# EAGLE board pinheader_v7 (EAGLE 9.2.2)
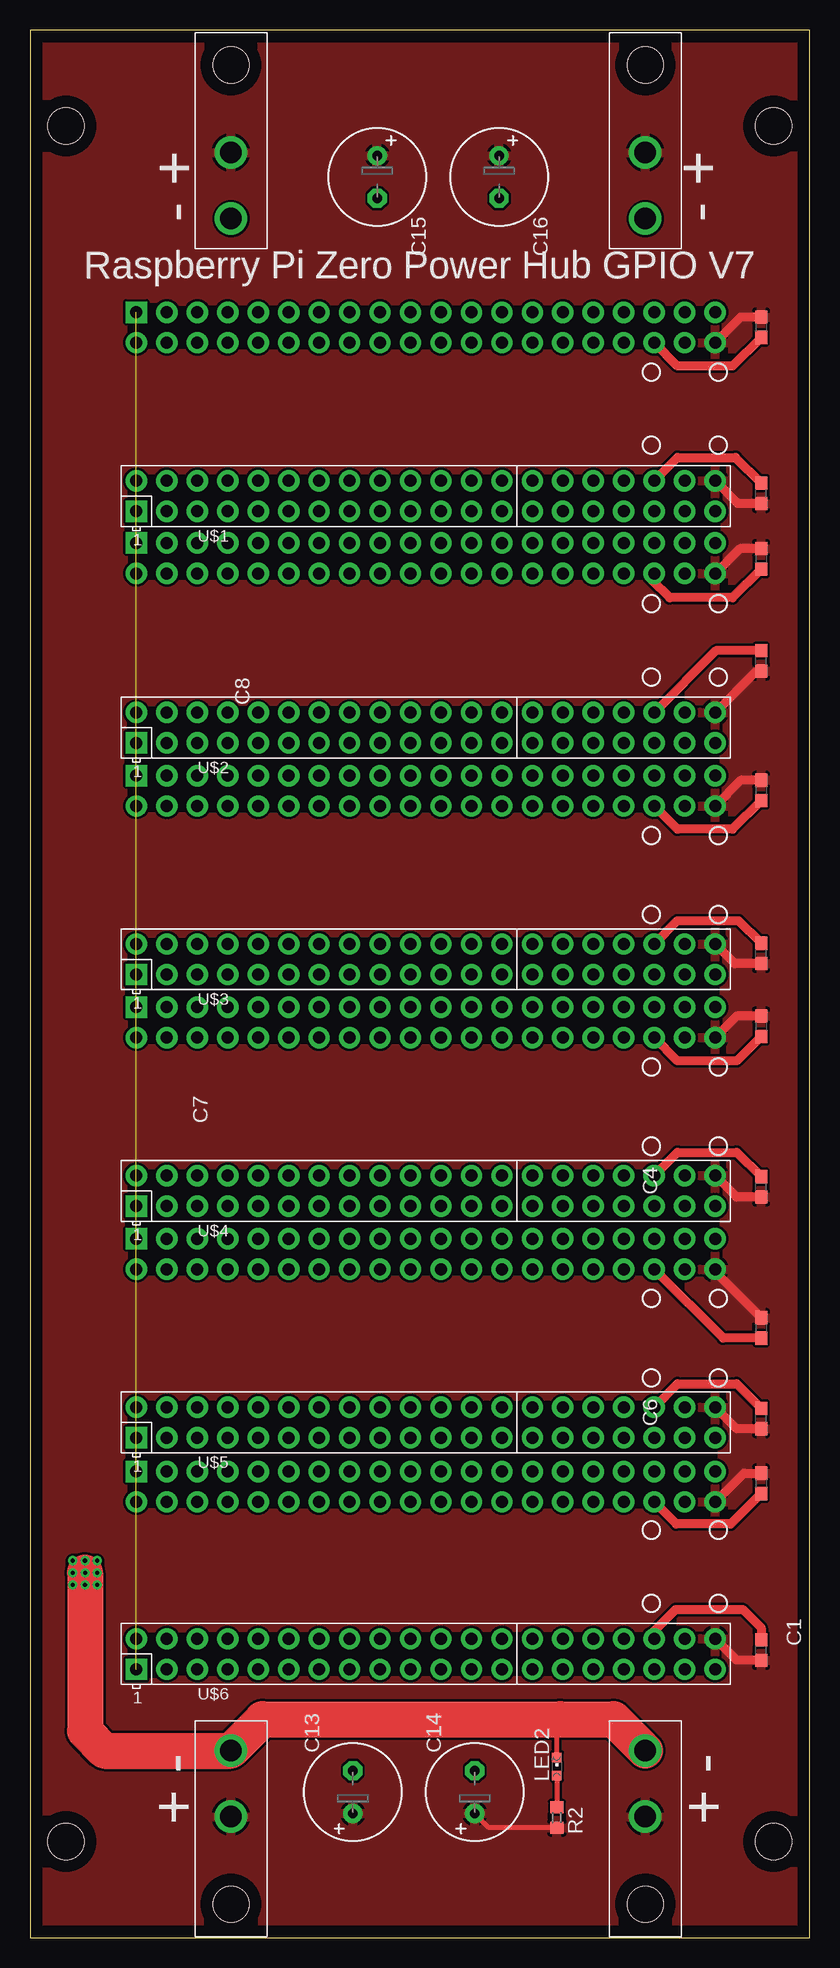
[diagram p0: board, top side]
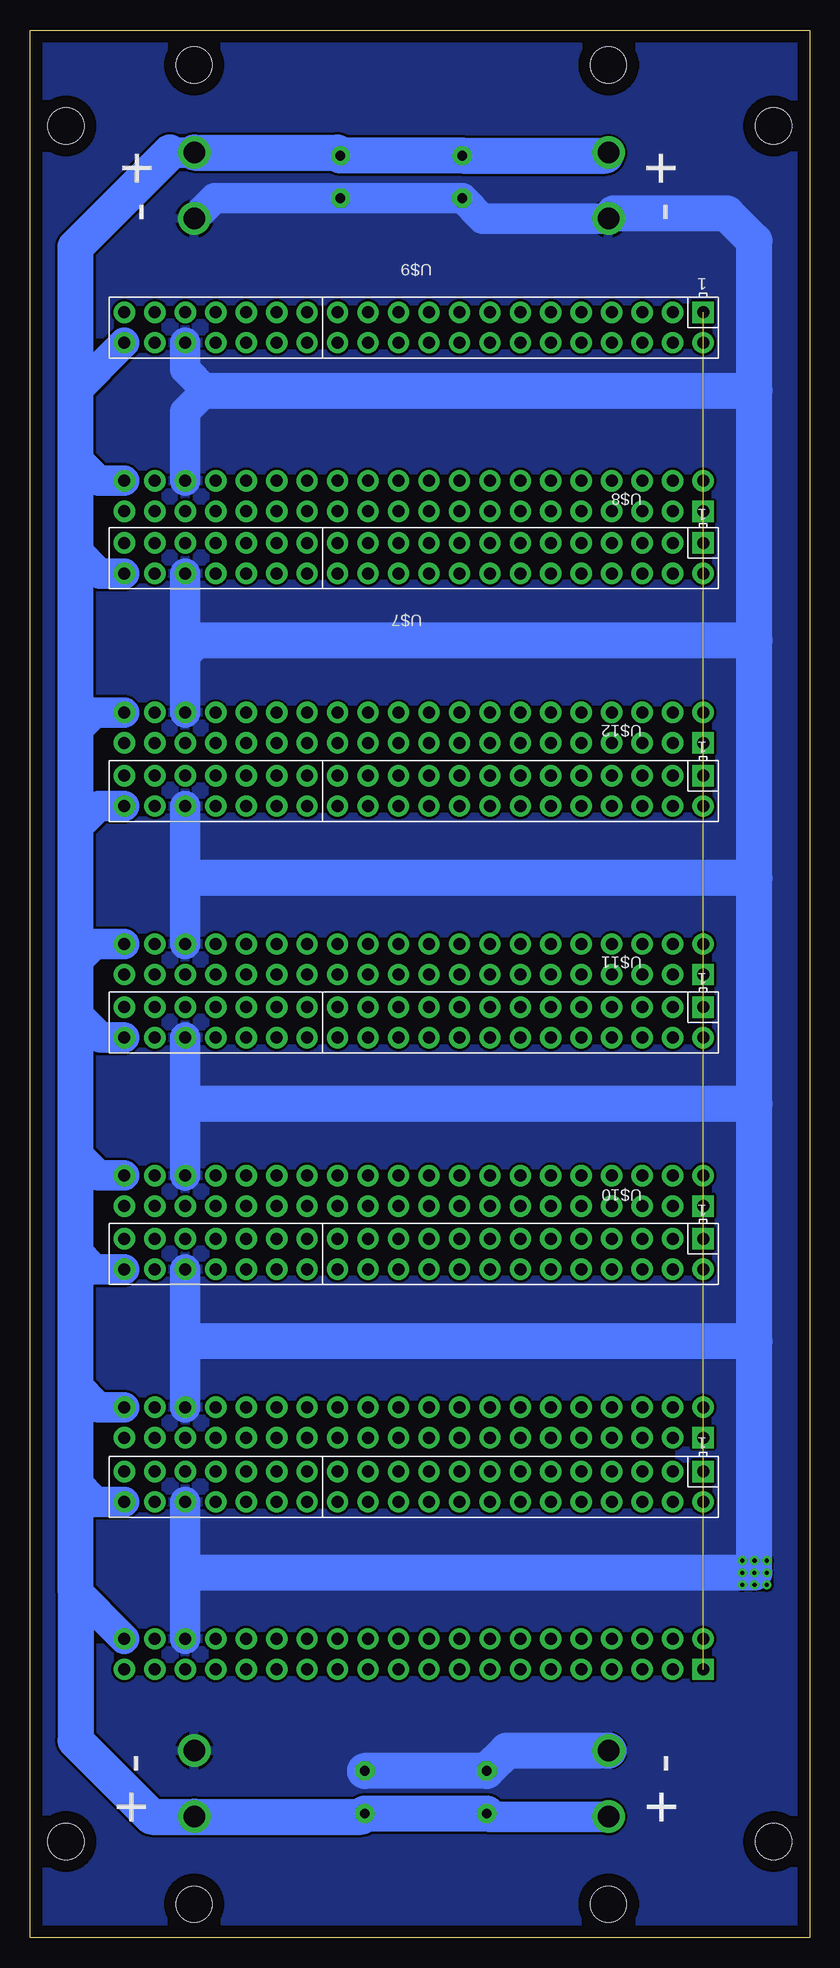
[diagram p1: board, bottom side, seen from below]

Size 65 x 159 mm. Coordinates in mm from the lower left corner, seen from the top.
Outline: 0,0 65,0 65,159 0,159 0,0
Copper layers (1*16): Top 0.035mm / dielectric 1.5mm / Bottom 0.035mm
Design rules "default *": minimum track width 6mil, minimum drill 0.35mm, track to track 8mil, track to pad 8mil, pad to pad 8mil, via to via 8mil, smd to smd 8mil, copper to edge 40mil, drill to drill 6mil, minimum pad ring 0mil, minimum via ring 8mil, stop-mask expansion 4mil, vias tented up to drill 0mil, thermal gap 10mil
Holes 3 mm at 3,8 62,8 3,151 62,151

## Footprints (pad centres in the part's own frame; a part is rotated, then mirrored left to right if it is on the bottom)
C0603 = smd 1.1 x 1: 1 -0.85,0; 2 0.85,0
E3,5-8 = drill 0.813 pad 1.6: + -1.778,0 | drill 0.813 pad 1.6 octagon: - 1.778,0
CHIPLED_0603 = smd 0.8 x 0.8: A 0,-0.75; C 0,0.75
R0603 = smd 1 x 1.1: 1 -0.85,0; 2 0.85,0
RASPI_GPIO_B+_PIN = drill 1 pad 1.778 square: 1 -24.13,-1.27 | drill 1 pad 1.778: 2 -24.13,1.27; 3 -21.59,-1.27; 4 -21.59,1.27; 5 -19.05,-1.27; 6 -19.05,1.27; 7 -16.51,-1.27; 8 -16.51,1.27; 9 -13.97,-1.27; 10 -13.97,1.27; 11 -11.43,-1.27; 12 -11.43,1.27; 13 -8.89,-1.27; 14 -8.89,1.27; 15 -6.35,-1.27; 16 -6.35,1.27; 17 -3.81,-1.27; 18 -3.81,1.27; 19 -1.27,-1.27; 20 -1.27,1.27; 21 1.27,-1.27; 22 1.27,1.27; 23 3.81,-1.27; 24 3.81,1.27; 25 6.35,-1.27; 26 6.35,1.27; 27 8.89,-1.27; 28 8.89,1.27; 29 11.43,-1.27; 30 11.43,1.27; 31 13.97,-1.27; 32 13.97,1.27; 33 16.51,-1.27; 34 16.51,1.27; 35 19.05,-1.27; 36 19.05,1.27; 37 21.59,-1.27; 38 21.59,1.27; 39 24.13,-1.27; 40 24.13,1.27
MINI-FIT_JR_CONN = drill 1.8: P$1 0,0; P$2 0,5.5 | hole 3: 0,-7.3

## Placement (x,y rotation side)
C1  [C0603]  60.96,23.96 90 top
C2  [C0603]  60.96,37.86 270 top
C3  [C0603]  60.96,75.96 270 top
C4  [C0603]  60.96,62.57 90 top
C5  [C0603]  60.96,50.81 270 top
C6  [C0603]  60.96,43.26 90 top
C7  [C0603]  60.96,82.03 90 top
C8  [C0603]  60.96,120.38 90 top
C9  [C0603]  60.96,134.22 270 top
C10  [C0603]  60.96,95.61 270 top
C11  [C0603]  60.96,106.41 90 top
C12  [C0603]  60.96,114.92 270 top
C13  [E3,5-8]  26.92,12.11 90 top
C14  [E3,5-8]  37.08,12.11 90 top
C15  [E3,5-8]  28.96,146.75 270 top
C16  [E3,5-8]  39.12,146.75 270 top
LED2  [CHIPLED_0603]  43.93,14.26 0 top
R2  [R0603]  43.93,10 270 top
U$1  RASPI_GPIO_B+_PWR  [RASPI_GPIO_B+_PIN]  33,120.15 0 top
U$2  RASPI_GPIO_B+_PWR  [RASPI_GPIO_B+_PIN]  33,100.84 0 top
U$3  RASPI_GPIO_B+_PWR  [RASPI_GPIO_B+_PIN]  33,81.54 0 top
U$4  RASPI_GPIO_B+_PWR  [RASPI_GPIO_B+_PIN]  33,62.24 0 top
U$5  RASPI_GPIO_B+_PWR  [RASPI_GPIO_B+_PIN]  33,42.93 0 top
U$6  RASPI_GPIO_B+_PWR  [RASPI_GPIO_B+_PIN]  33,23.63 0 top
U$7  RASPI_GPIO_B+_PWR  [RASPI_GPIO_B+_PIN]  33,114.98 180 bottom
U$8  RASPI_GPIO_B+_PWR  [RASPI_GPIO_B+_PIN]  33,95.58 180 bottom
U$9  RASPI_GPIO_B+_PWR  [RASPI_GPIO_B+_PIN]  33,134.2 180 bottom
U$10  RASPI_GPIO_B+_PWR  [RASPI_GPIO_B+_PIN]  33,37.58 180 bottom
U$11  RASPI_GPIO_B+_PWR  [RASPI_GPIO_B+_PIN]  33,56.98 180 bottom
U$12  RASPI_GPIO_B+_PWR  [RASPI_GPIO_B+_PIN]  33,76.28 180 bottom
U$13  MOLEX_0039301022  [MINI-FIT_JR_CONN]  51.31,10.08 0 top
U$14  MOLEX_0039301022  [MINI-FIT_JR_CONN]  16.76,10.08 0 top
U$15  MOLEX_0039301022  [MINI-FIT_JR_CONN]  16.76,148.78 180 top
U$16  MOLEX_0039301022  [MINI-FIT_JR_CONN]  51.31,148.78 180 top

## Library data of the parts
C1-C12 = rcl; SPICEPREFIX: C
C13-C16 LED2 R2 = adafruit
U$1-U$12 = raspberrypi_bastelstube_v13
U$13-U$16 = pat

## Nets
3V3: U$1.1 U$2.1 U$3.1 U$4.1 U$5.1 U$6.1 U$7.1 U$8.1 U$9.1 U$10.1 U$11.1 U$12.1
GND: C1.2 C2.2 C3.2 C4.2 C5.2 C6.2 C7.2 C8.2 C9.2 C10.2 C11.2 C12.2 C13.- C14.- C15.- C16.- LED2.C U$1.36 U$2.36 U$3.36 U$4.36 U$5.36 U$6.36 U$7.36 U$8.36 U$9.36 U$10.36 U$11.36 U$12.36 U$13.P$2 U$14.P$2 U$15.P$2 U$16.P$2
N$4: LED2.A R2.1
V+: C1.1 C2.1 C3.1 C4.1 C5.1 C6.1 C7.1 C8.1 C9.1 C10.1 C11.1 C12.1 C13.+ C14.+ C15.+ C16.+ R2.2 U$1.40 U$2.40 U$3.40 U$4.40 U$5.40 U$6.40 U$7.40 U$8.40 U$9.40 U$10.40 U$11.40 U$12.40 U$13.P$1 U$14.P$1 U$15.P$1 U$16.P$1

## Tracks (layer width: path | path; a pad name or v marks a point on that pad's centre or on a via)
3V3  (11 unrouted)
GND  (via drill 0.35)
  Top 0.406: LED2.C 43.93,17.94 44.2,18.21
  Top 0.762: U$6.36 52.05,25.55 53.85,27.35 59.44,27.35 60.96,25.83 C1.2 | C2.2 58.42,34.46 53.89,34.46 U$10.36 | U$5.36 53.99,46.15 58.93,46.15 C6.2 | U$4.36 53.99,65.45 58.93,65.45 C4.2 | C3.2 58.93,73.07 53.98,73.07 U$12.36 | U$3.36 53.99,84.76 59.08,84.76 C7.2 | C10.2 58.57,92.38 53.98,92.38 U$8.36 | C12.2 58.57,111.68 53.34,111.68 51.82,113.2 52.05,113.44 U$7.36 | U$1.36 53.99,123.36 58.83,123.36 C8.2 | C9.2 58.57,130.98 54,130.98 U$9.36 | C11.2 57.2,107.26 U$2.36 | C5.2 57.8,49.96 U$11.36
  Top 3: v4.59,30.4 4.59,17.19 6.2,15.58 U$14.P$2 19.39,18.21 44.2,18.21 48.68,18.21 U$13.P$2
  Bottom 2.54: U$9.36 52.05,130.71 50.29,128.95 52.05,127.19 U$1.36 | 50.8,108.12 52.05,106.87 U$2.36 U$7.36 | 51.31,88.31 52.05,87.57 | 52.05,87.57 U$3.36 | U$8.36 52.05,87.57 | 51.82,69.52 52.05,69.75 U$12.36 U$4.36 | 51.82,49.7 52.05,49.94 U$11.36 U$5.36 | 51.82,30.4 52.05,30.17 | 52.05,30.17 U$6.36 | U$10.36 52.05,30.17 | 16.34,143.7 U$15.P$2 27.27,143.28 C15.- C16.- 49.62,144.97 U$16.P$2
  Bottom 3: 4.59,49.7 v4.59,30.4 v5.6,30.4 51.82,30.4 | 4.59,49.7 4.59,69.52 | 4.59,69.52 4.59,88.31 | 4.59,88.31 4.59,108.12 | 4.59,108.12 4.59,128.95 | 50.29,128.95 4.59,128.95 | 4.59,128.95 4.59,141.4 6.89,143.7 16.34,143.7 | 4.59,108.12 50.8,108.12 | 4.59,88.31 51.31,88.31 | 51.82,69.52 4.59,69.52 | 4.59,49.7 51.82,49.7 | C14.- C13.- 25.23,15.58 U$14.P$2
  pour Bottom: 0,161.34 65.02,161.34 65.02,0 0,0
N$1  (via drill 0.35)
  other vias: 3.57,30.4
N$2  (via drill 0.35)
  other vias: 4.59,29.38
N$3  (via drill 0.35)
  other vias: 5.6,29.38
N$4
  Top 0.406: LED2.A R2.1
N$5  (via drill 0.35)
  other vias: 3.57,29.38
N$6  (via drill 0.35)
  other vias: 3.57,31.42
N$7  (via drill 0.35)
  other vias: 4.59,31.42
N$8  (via drill 0.35)
  other vias: 5.6,31.42
V+
  Top 0.406: R2.2 38.26,9.15 C14.+
  Top 0.762: C1.1 58.92,23.11 U$6.40 | U$10.40 59.53,38.71 C2.1 | C6.1 58.92,42.41 U$5.40 | C4.1 58.92,61.72 U$4.40 | C3.1 58.93,76.81 U$12.40 | C7.1 58.77,81.18 U$3.40 | C10.1 59.29,96.46 U$8.40 | C12.1 59.19,115.77 U$7.40 | C8.1 59.02,119.53 U$1.40 | C9.1 59.27,135.07 U$9.40 | C11.1 60.58,105.56 U$2.40 | U$11.40 57.13,55.49 C5.1
  Bottom 2.54: U$6.40 61.2,28.97 | U$9.40 61.2,128.86 | 61.2,123.35 59.27,121.42 U$1.40 | U$7.40 59.18,113.71 61.2,115.73 | U$2.40 59.6,102.11 61.2,100.52 | U$8.40 59.28,94.31 61.2,92.39 | U$3.40 59.6,82.81 61.2,81.22 | U$12.40 59.09,75.01 61.2,77.12 | U$4.40 59.27,63.51 61.2,65.44 | U$11.40 59.6,55.71 61.2,57.31 | U$5.40 59.27,44.2 61.2,46.13 | U$10.40 59.5,36.31 61.2,38 | 37.34,10.08 C14.+ | C13.+ 26.67,10.08 U$14.P$1 | C16.+ 39.37,148.78 | 17.02,148.53 U$15.P$1 | 53.34,148.78 U$16.P$1
  Bottom 3: 37.34,10.08 U$13.P$1 54.86,10.08 61.2,16.41 61.2,28.97 61.2,38 61.2,46.13 61.2,57.31 61.2,65.44 61.2,77.12 61.2,81.22 61.2,92.39 61.2,100.52 61.2,115.73 61.2,123.35 61.2,128.86 61.2,140.92 53.34,148.78 | C14.+ C13.+ | U$16.P$1 39.37,148.78 | C16.+ C15.+ 17.02,148.53
  pour Top: 0,160.34 65.02,160.34 65.02,-0.51 0,-0.51

## Text on the board
tPlace: - + | - + | Raspberry Pi Zero Power Hub GPIO V7 | + - | + -
bPlace: - + | - + | + - | + -